# EAGLE board SELE_PROJECT (EAGLE 9.2.2)
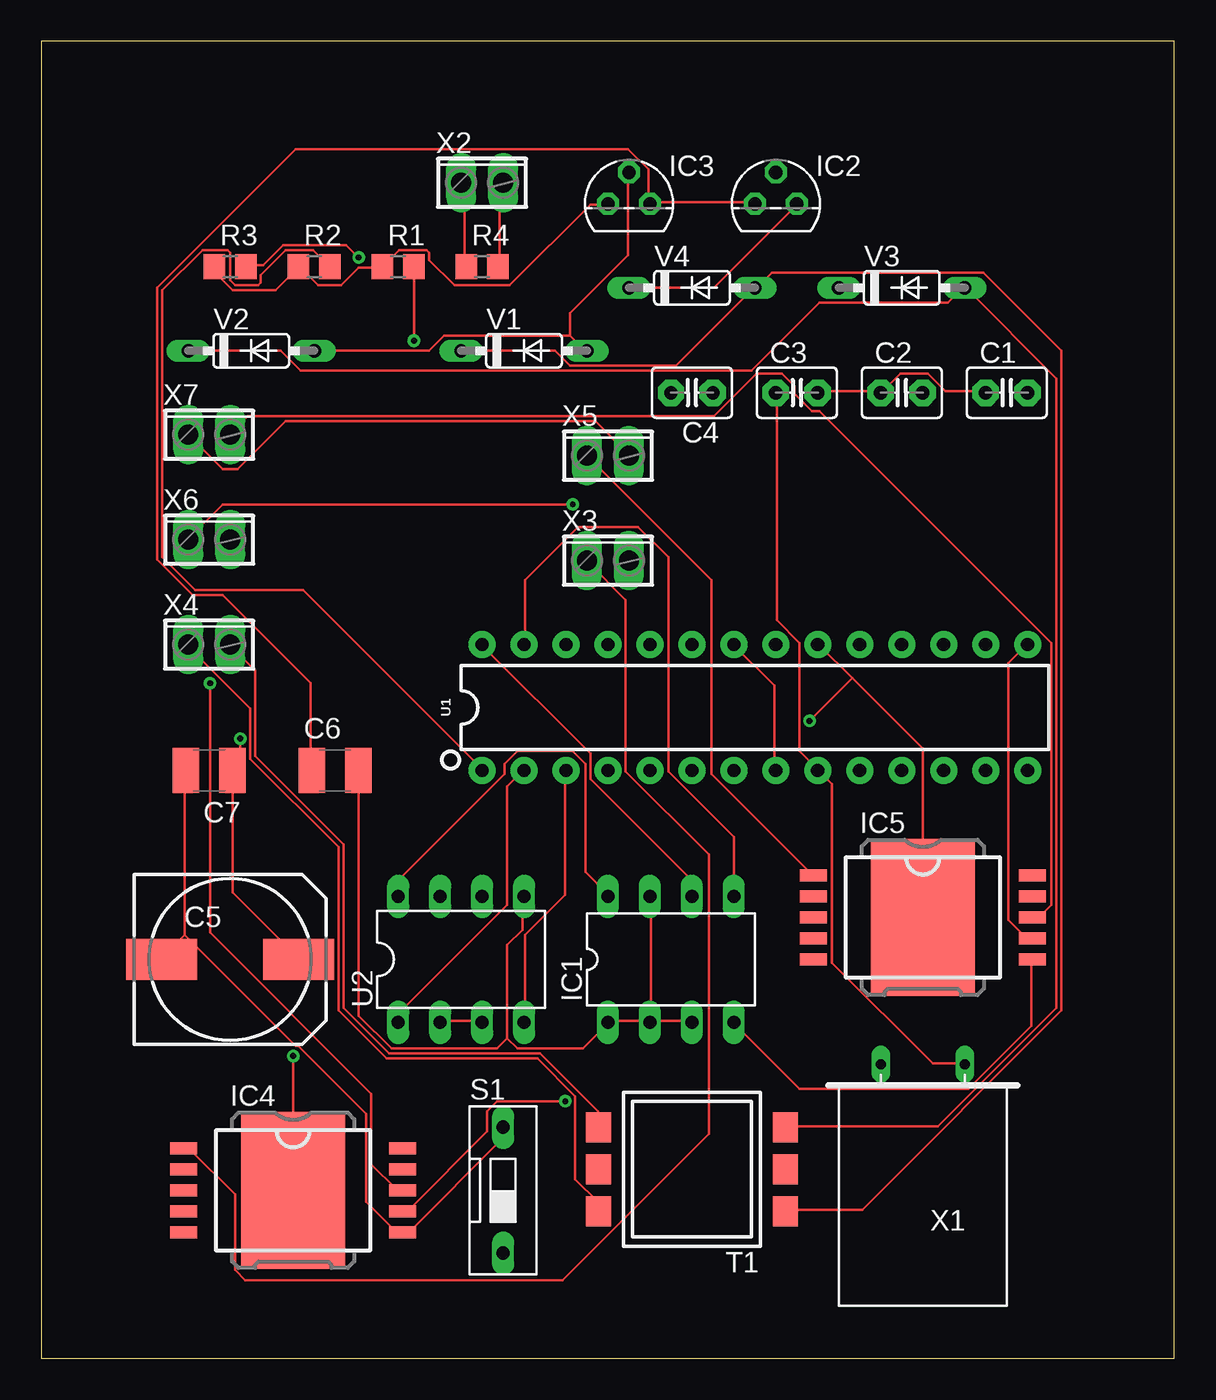
[diagram p0: board, top side]
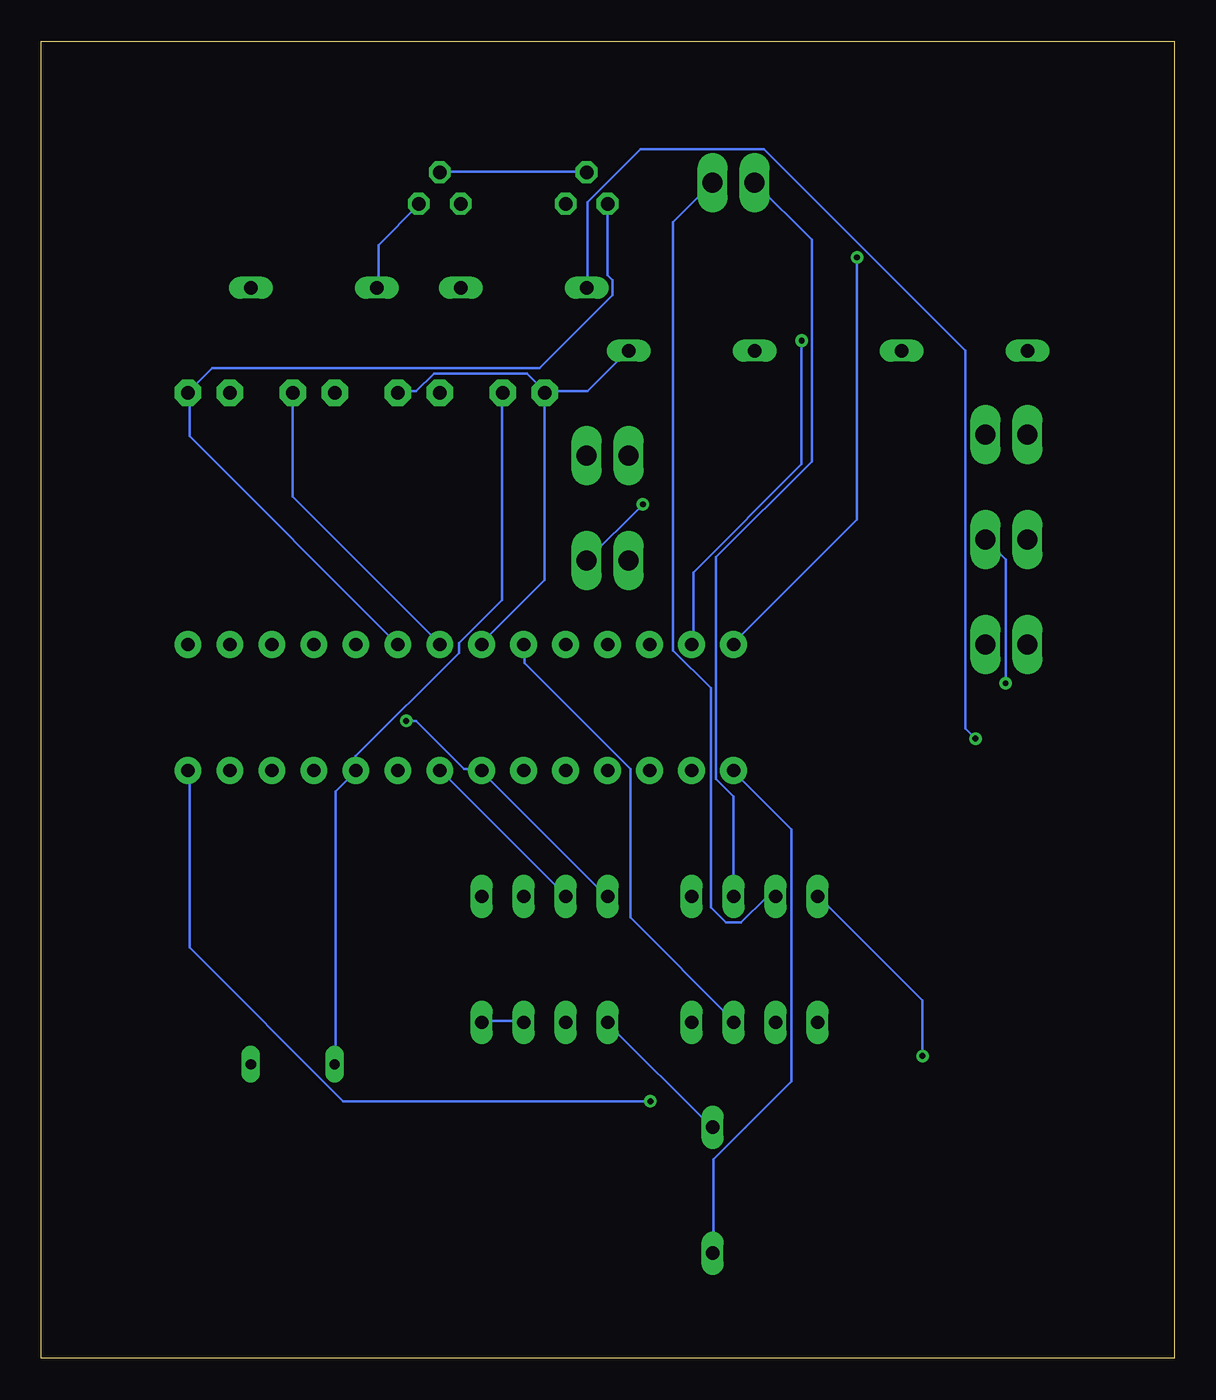
[diagram p1: board, bottom side, seen from below]

Size 68.56 x 79.68 mm. Coordinates in mm from the lower left corner, seen from the top.
Outline: 0,0 68.56,0 68.56,79.68 0,79.68 0,0
Copper layers (1*16): Top 0.035mm / dielectric 1.5mm / Bottom 0.035mm
Design rules "default": minimum track width 6mil, minimum drill 0.35mm, track to track 6mil, track to pad 6mil, pad to pad 6mil, via to via 6mil, smd to smd 6mil, copper to edge 40mil, drill to drill 6mil, minimum pad ring 10mil, minimum via ring 8mil, stop-mask expansion 4mil, vias tented up to drill 0mil, thermal gap 10mil
Net classes: 0 default: width 50.8 mm, drill 0.038 mm

## Footprints (pad centres in the part's own frame; a part is rotated, then mirrored left to right if it is on the bottom)
C2.5-3 = drill 0.813 pad 1.6 octagon: 1 -1.27,0; 2 1.27,0
150CLZ-1010 = smd 4.3 x 2.5: + 4.15,0; - -4.15,0
C1210 = smd 1.6 x 2.7: 1 -1.4,0; 2 1.4,0
DIL08 = drill 0.813 long: 1 -3.81,-3.81; 2 -1.27,-3.81; 3 1.27,-3.81; 4 3.81,-3.81; 5 3.81,3.81; 6 1.27,3.81; 7 -1.27,3.81; 8 -3.81,3.81
TO92 = drill 0.813 octagon: 1 -1.27,0; 2 0,1.905; 3 1.27,0
POWER-SO10 = smd 1.65 x 0.73: 1 -6.625,2.54; 2 -6.625,1.27; 3 -6.625,0; 4 -6.625,-1.27; 5 -6.625,-2.54; 6 6.625,-2.54; 7 6.625,-1.27; 8 6.625,0; 9 6.625,1.27; 10 6.625,2.54 | smd 6.3 x 9.5: P 0,0
R0805 = smd 1.3 x 1.5: 1 -0.95,0; 2 0.95,0
DS-01 = drill 0.813 long: 1 0,-3.81; 2 0,3.81
SM-EP7 = smd 1.8 x 1.5: 1 -2.54,5.65; 2 0,5.65; 3 2.54,5.65; 4 2.54,-5.65; 5 0,-5.65; 6 -2.54,-5.65
MICROCONTROLLER_DIP28 = drill 0.813 pad 1.626: 1 -16.51,-3.81; 2 -13.97,-3.81; 3 -11.43,-3.81; 4 -8.89,-3.81; 5 -6.35,-3.81; 6 -3.81,-3.81; 7 -1.27,-3.81; 8 1.27,-3.81; 9 3.81,-3.81; 10 6.35,-3.81; 11 8.89,-3.81; 12 11.43,-3.81; 13 13.97,-3.81; 14 16.51,-3.81; 15 16.51,3.81; 16 13.97,3.81; 17 11.43,3.81; 18 8.89,3.81; 19 6.35,3.81; 20 3.81,3.81; 21 1.27,3.81; 22 -1.27,3.81; 23 -3.81,3.81; 24 -6.35,3.81; 25 -8.89,3.81; 26 -11.43,3.81; 27 -13.97,3.81; 28 -16.51,3.81
DO35-7 = drill 0.813 long: A 3.81,0; C -3.81,0
Q = drill 0.61 long: 1 -2.54,-7.62; 2 2.54,-7.62
2POL254 = drill 1.2 long: 1 -1.27,0; 2 1.27,0

## Placement (x,y rotation side)
C1  100n  [C2.5-3]  58.42,58.42 0 top
C2  100n  [C2.5-3]  52.07,58.42 0 top
C3  22p  [C2.5-3]  45.72,58.42 0 top
C4  22p  [C2.5-3]  39.37,58.42 180 top
C5  1500u/35V  [150CLZ-1010]  11.43,24.13 0 top
C6  0.1u  [C1210]  17.78,35.56 0 top
C7  0.1u  [C1210]  10.16,35.56 180 top
IC1  D1 (24LC1025)  [DIL08]  38.1,24.13 0 top
IC2  D2 (7812L)  [TO92]  44.45,69.85 0 top
IC3  D3 (7805L)  [TO92]  35.56,69.85 0 top
IC4  VN460SP  [POWER-SO10]  15.24,10.16 0 top
IC5  VN460SP  [POWER-SO10]  53.34,26.67 0 top
R1  10k  [R0805]  21.59,66.04 0 top
R2  47k  [R0805]  16.51,66.04 0 top
R3  10k  [R0805]  11.43,66.04 0 top
R4  120  [R0805]  26.67,66.04 0 top
S1  [DS-01]  27.94,10.16 0 top
T1  230V to 12V AC  [SM-EP7]  39.37,11.43 90 top
U1  328P  [MICROCONTROLLER_DIP28]  43.18,39.37 0 top
U2  LTC485N  [DIL08]  25.4,24.13 0 top
V1  1N4148DO35-7  [DO35-7]  29.21,60.96 0 top
V2  1N4148DO35-7  [DO35-7]  12.7,60.96 0 top
V3  1N4148DO35-7  [DO35-7]  52.07,64.77 0 top
V4  1N4148DO35-7  [DO35-7]  39.37,64.77 0 top
X1  16MHz  [Q]  53.34,10.16 180 top
X2  [2POL254]  26.67,71.12 0 top
X3  LAMP CONNECTOR  [2POL254]  34.29,48.26 0 top
X4  230V AC CONNECTOR  [2POL254]  10.16,43.18 0 top
X5  LAMP CONNECTOR  [2POL254]  34.29,54.61 0 top
X6  230V AC CONNECTOR  [2POL254]  10.16,49.53 0 top
X7  230V AC CONNECTOR  [2POL254]  10.16,55.88 0 top

## Library data of the parts
C1-C4 = capacitor-wima
C5 = rcl; SPICEPREFIX: C
C6 C7 = eagle-ltspice; SPICEMODEL: NONE; SPICEPREFIX: C
IC1 = atmel; MPN: AT24C1024BW-SH-B; OC_FARNELL: 1362646; OC_NEWARK: 03P2044
IC2 IC3 = linear
IC4 IC5 = st-microelectronics; MPN: VN460SP; OC_FARNELL: unknown; OC_NEWARK: 57P5296
R1-R4 = eagle-ltspice; SPICEMODEL: NONE; SPICEPREFIX: R
S1 = switch-dil; OC_FARNELL: unknown; OC_NEWARK: unknown
T1 = inductor-neosid; OC_FARNELL: unknown; OC_NEWARK: unknown
U1 = SBMI-SELE; PROD_ID: IC-09136
U2 = linear-technology; OC_FARNELL: unknown; OC_NEWARK: unknown
V1-V4 = diode
X1 = special
X2-X7 = con-phoenix-254; OC_FARNELL: unknown; OC_NEWARK: unknown

## Nets
GND: C1.1 C2.1 C3.2 C4.2 C5.- C6.2 C7.2 IC1.1 IC1.2 IC1.3 IC1.4 IC1.7 IC2.2 IC3.2 IC4.6 IC5.6 S1.2 U1.8 U1.22 U2.5 V1.A V2.A
N$1: C4.1 U1.10 X1.2
N$2: U1.2 U2.1
N$3: IC1.5 R1.2 U1.27
N$4: U1.3 U2.4
N$5: IC1.6 R3.2 U1.28
N$6: R4.1 U2.6 X2.1
N$7: U1.23 U2.2 U2.3
N$8: R2.2 S1.1 U1.1
N$9: R4.2 U2.7 X2.2
N$10: C2.2 U1.21
N$11: T1.6 V1.C V4.A
N$12: T1.4 V2.C V3.A
N$13: T1.1 X4.1
N$14: T1.2 T1.3 X4.2
N$15: IC4.7 U1.14
N$16: C5.+ C7.1 IC2.3 V3.C V4.C
N$18: C6.1 IC2.1 IC3.3
N$19: IC5.7 U1.15
N$20: IC4.1 X3.1
N$21: IC5.1 X5.1
N$22: IC4.8 X6.2
N$23: X3.2 X6.1
N$24: IC5.8 X7.2
N$25: X5.2 X7.1
VCC: C1.2 IC1.8 IC3.1 IC4.P IC5.P R1.1 R2.1 R3.1 U1.7 U1.20 U2.8
X1: C3.1 U1.9 X1.1

## Tracks (layer width: path | path; a pad name or v marks a point on that pad's centre or on a via)
GND
  Top 0.152: C3.2 47.09,58.52 50.75,58.52 C2.1 51.97,59.59 53.65,59.59 54.71,58.52 57.15,58.52 C1.1 | V2.A 23.47,60.96 24.38,61.87 32,61.87 | 32,61.87 32.92,60.96 V1.A | 32,61.87 32,63.25 35.51,66.75 35.51,71.63 IC3.2 | IC5.6 59.89,24.08 59.89,20.12 56.08,16.31 45.87,16.31 41.91,20.27 IC1.4 | 8.69,25.6 8.69,35.51 C7.2 | 8.69,25.6 7.32,24.23 C5.- | U1.8 44.35,35.66 44.35,40.69 41.91,43.13 U1.22 | S1.2 27.89,13.87 27.89,13.26 22.25,7.62 IC4.6 21.49,7.62 19.66,9.45 19.66,14.78 15.54,18.9 15.39,18.9 8.69,25.6 | 28.19,19.36 28.19,24.99 29.11,25.91 29.11,27.89 U2.5 | 28.19,19.36 28.8,18.75 32.77,18.75 34.29,20.27 IC1.1 34.29,20.42 36.73,20.42 IC1.2 36.88,20.42 | 36.88,20.42 36.88,27.89 IC1.7 | 28.19,19.36 27.58,18.75 21.18,18.75 19.2,20.73 19.2,35.51 C6.2 | 36.88,20.42 39.32,20.42 IC1.3
  Bottom 0.152: IC3.2 35.66,71.78 44.35,71.78 IC2.2 | 38.1,58.52 35.51,58.52 33.07,60.96 V1.A | 38.1,58.52 39.17,59.59 44.81,59.59 45.87,58.52 46.94,58.52 C3.2 | 38.1,58.52 C4.2 38.1,47.09 41.91,43.28 U1.22 | IC1.3 39.47,20.42 41.91,20.42 IC1.4 | S1.2 28.04,14.02 34.29,20.27 IC1.1 | U1.8 44.35,35.51 36.88,28.04 IC1.7
N$1
  Bottom 0.152: X1.2 50.75,17.83 50.75,34.29 49.53,35.51 U1.10 49.53,36.42 43.28,42.67 43.28,43.28 40.69,45.87 40.69,58.37 C4.1
N$2
  Top 0.152: U2.1 21.64,20.42 21.64,20.88 28.19,27.43 28.19,34.59 29.11,35.51 U1.2
N$3  (via drill 0.35)
  Top 0.152: v22.55,61.57 22.55,65.99 R1.2 | IC1.5 41.91,31.55 37.95,35.51 37.95,48.46 36.12,50.29 32.46,50.29 29.26,47.09 29.26,43.28 U1.27
  Bottom 0.152: v22.55,61.57 22.55,54.1 29.11,47.55 29.11,43.28 U1.27
N$4
  Top 0.152: U2.4 29.26,20.42 29.26,25.6 31.7,28.04 31.7,35.51 U1.3
N$5  (via drill 0.35)
  Top 0.152: v19.2,66.6 18.44,67.36 14.63,67.36 13.41,66.14 12.5,66.14 R3.2 | IC1.6 39.32,28.04 39.32,28.96 33.22,35.05 33.22,36.58 26.67,43.13 U1.28
  Bottom 0.152: v19.2,66.6 19.2,50.75 26.67,43.28 U1.28
N$6
  Top 0.152: R4.1 25.6,66.14 25.6,70.87 25.45,71.02 X2.1
  Bottom 0.152: U2.6 26.67,33.98 27.74,35.05 27.74,48.46 21.95,54.25 21.95,67.67 X2.1
N$7
  Top 0.152: U2.2 24.23,20.42 26.67,20.42 U2.3
  Bottom 0.152: U1.23 39.32,43.13 39.32,42.06 32.92,35.66 32.92,26.67 26.67,20.42 U2.3
N$8
  Top 0.152: R2.2 17.37,66.14 16.46,67.06 14.78,67.06 13.26,65.53 13.26,65.08 13.11,64.92 11.73,64.92 11.43,65.23 11.43,66.9 11.28,67.06 9.75,67.06 7.32,64.62 7.32,48.46 9.3,46.48 15.85,46.48 26.67,35.66 U1.1
  Bottom 0.152: S1.1 27.89,6.4 27.89,12.04 23.16,16.76 23.16,32 26.67,35.51 U1.1
N$9
  Top 0.152: R4.2 27.74,66.14 27.74,70.87 27.89,71.02 X2.2
  Bottom 0.152: X2.2 30.33,68.73 30.33,42.82 28.04,40.54 28.04,27.28 27.13,26.36 26.21,26.36 24.69,27.89 24.23,27.89 U2.7
N$10
  Bottom 0.152: C2.2 53.34,52.12 44.5,43.28 U1.21
N$11
  Top 0.152: T1.6 45.11,8.99 49.68,8.99 61.72,21.03 61.72,60.96 57,65.68 44.2,65.68 43.28,64.77 V4.A 43.13,64.77 38.41,60.05 32,60.05 31.09,60.96 V1.C
N$12
  Top 0.152: T1.4 45.11,14.02 54.25,14.02 61.42,21.18 61.42,59.28 55.93,64.77 V3.A 55.78,64.77 54.86,63.86 47.09,63.86 42.98,59.74 15.7,59.74 14.48,60.96 V2.C
N$13
  Top 0.152: T1.1 33.68,8.99 33.68,9.45 32.31,10.82 32.31,15.85 30.02,18.14 20.88,18.14 17.98,21.03 17.98,30.94 12.65,36.27 12.65,39.32 8.84,43.13 X4.1
N$14
  Top 0.152: T1.3 33.68,14.02 33.68,14.94 30.18,18.44 21.03,18.44 18.29,21.18 18.29,31.09 12.95,36.42 12.95,41.6 11.43,43.13 X4.2
N$15  (via drill 0.35)
  Top 0.152: v31.7,15.54 27.58,15.54 26.98,14.94 26.98,13.72 22.25,8.99 21.95,8.99 IC4.7
  Bottom 0.152: v31.7,15.54 50.29,15.54 59.59,24.84 59.59,35.51 U1.14
N$16  (via drill 0.35)
  Top 0.152: V4.C 40.69,64.77 45.72,69.8 IC2.3 | C5.+ 15.54,24.23 11.58,28.19 11.58,35.51 C7.1 11.58,35.66 12.04,36.12 v12.04,37.49
  Bottom 0.152: V3.C 48.16,64.77 48.16,67.36 45.72,69.8 IC2.3 | v12.04,37.49 12.65,38.1 12.65,60.96 24.84,73.15 32.31,73.15 35.51,69.95 35.51,64.77 V4.C
N$18
  Top 0.152: IC2.1 43.13,69.95 36.88,69.95 IC3.3 36.73,69.95 36.73,71.93 35.51,73.15 15.39,73.15 7.01,64.77 7.01,48.31 9.14,46.18 10.97,46.18 16.31,40.84 16.31,35.66 C6.1
N$19
  Top 0.152: IC5.7 59.89,25.45 59.59,25.45 58.52,26.52 58.52,42.06 59.59,43.13 U1.15
N$20
  Top 0.152: IC4.1 8.69,12.65 8.99,12.65 11.73,9.91 11.73,5.33 12.34,4.72 31.55,4.72 40.39,13.56 40.39,30.48 35.36,35.51 35.36,45.87 33.07,48.16 X3.1
N$21
  Top 0.152: X5.1 40.54,47.09 40.54,35.36 46.63,29.26 IC5.1
N$22  (via drill 0.35)
  Top 0.152: v10.21,40.84 10.21,25.76 19.96,16 19.96,11.73 21.49,10.21 21.79,10.21 IC4.8
  Bottom 0.152: v10.21,40.84 10.21,48.31 X6.2
N$23  (via drill 0.35)
  Top 0.152: v32.16,51.66 10.97,51.66 8.84,49.53 X6.1
  Bottom 0.152: v32.16,51.66 X3.2
N$24
  Top 0.152: IC5.8 60.35,26.67 61.11,27.43 61.11,43.28 47.09,57.3 46.63,57.3 45.57,58.37 45.57,58.83 44.81,59.59 43.28,59.59 40.69,57 12.5,57 11.43,55.93 X7.2
N$25
  Top 0.152: X7.1 10.97,53.8 11.89,53.8 14.78,56.69 33.53,56.69 35.51,54.71 X5.2
VCC  (via drill 0.35)
  Top 0.152: U2.8 21.64,28.04 21.64,28.96 28.04,35.36 28.04,35.97 28.8,36.73 32.16,36.73 32.92,35.97 32.92,29.41 34.29,28.04 IC1.8 | v15.24,18.29 IC4.P | R3.1 10.52,65.99 10.52,65.68 11.58,64.62 14.17,64.62 15.54,65.99 R2.1 15.7,65.99 16.76,64.92 18.14,64.92 19.2,65.99 20.57,65.99 R1.1 20.73,66.14 21.64,67.06 23.32,67.06 23.47,66.9 23.47,66.45 24.99,64.92 28.35,64.92 33.22,69.8 34.29,69.8 IC3.1 | IC5.P 53.34,36.88 49.07,41.15 | 49.07,41.15 47.09,43.13 U1.20 | 49.07,41.15 v46.48,38.56
  Bottom 0.152: IC1.8 34.29,27.89 41.91,35.51 U1.7 41.91,35.66 42.98,35.66 45.87,38.56 v46.48,38.56 | v15.24,18.29 15.24,21.64 21.49,27.89 U2.8 | U1.20 59.59,55.78 59.59,58.37 C1.2 58.22,59.89 38.41,59.89 33.98,64.31 33.98,65.23 34.29,65.53 IC3.1
X1
  Top 0.152: X1.1 55.78,17.83 53.95,17.83 47.85,23.93 47.85,34.75 47.09,35.51 U1.9 46.94,35.66 45.87,36.73 45.87,43.28 44.5,44.65 44.5,58.37 C3.1